# Altium PCB PCB 4-20MA.PcbDoc
Units mil, origin at the board's own origin, x right, y up, seen from the top; angles counter-clockwise.
Board outline 925 x 1250 mil, 2 copper layers (Top Layer, Bottom Layer), stack 65.792 mil thick; 15 components, 10 nets, 35 pads, 0 vias.
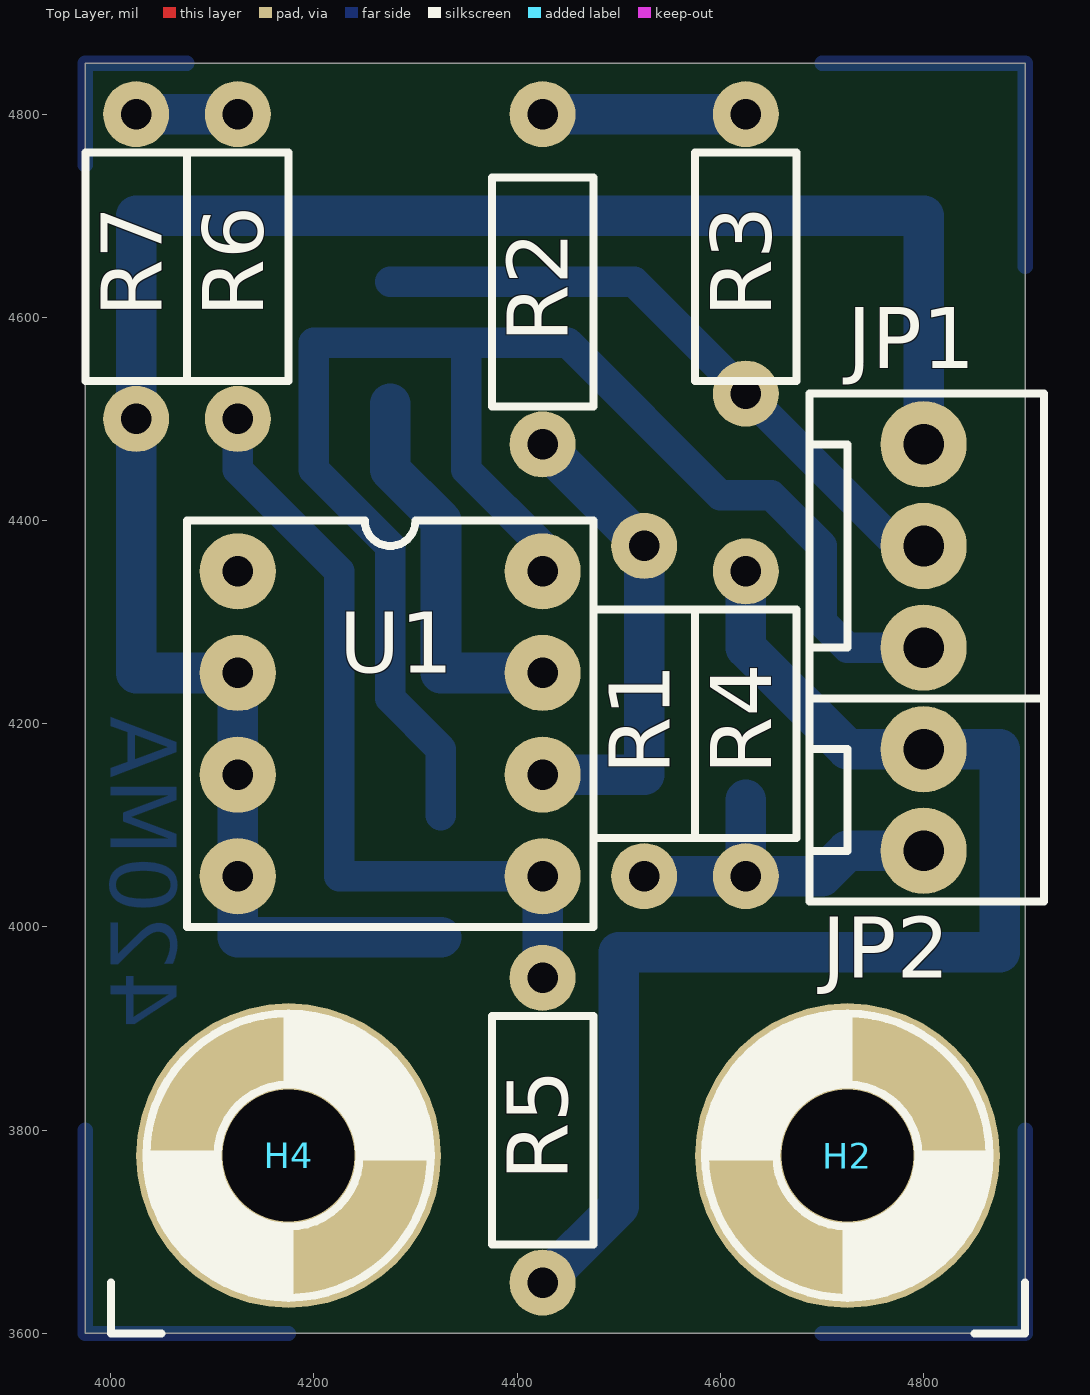
[diagram p0: Top Layer view]
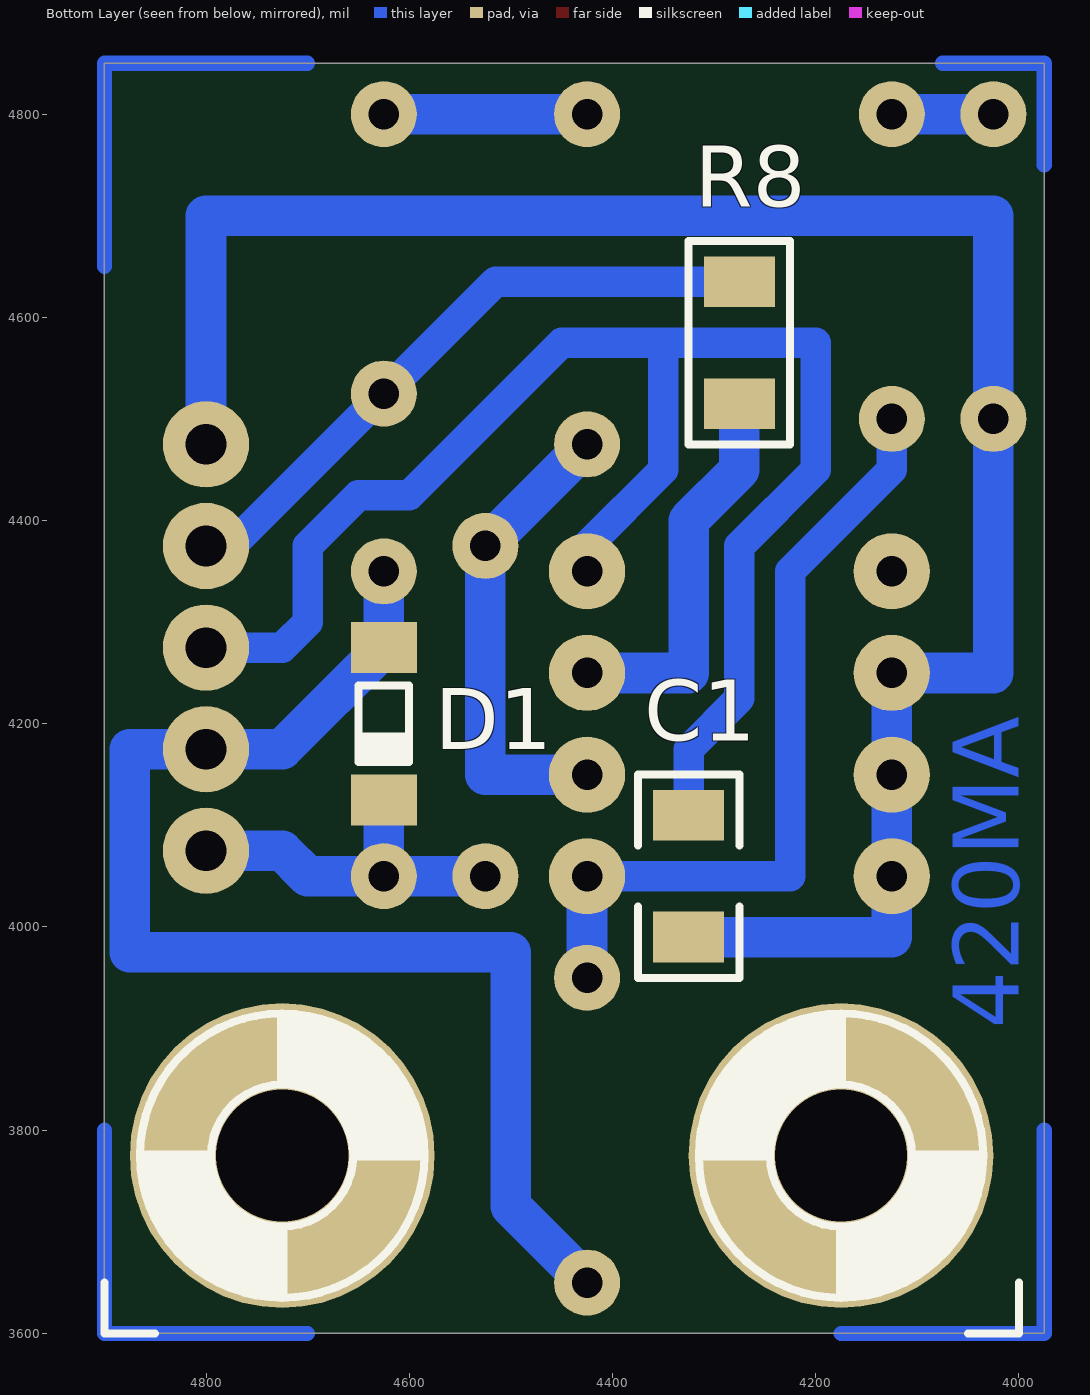
[diagram p1: Bottom Layer view, seen from below]
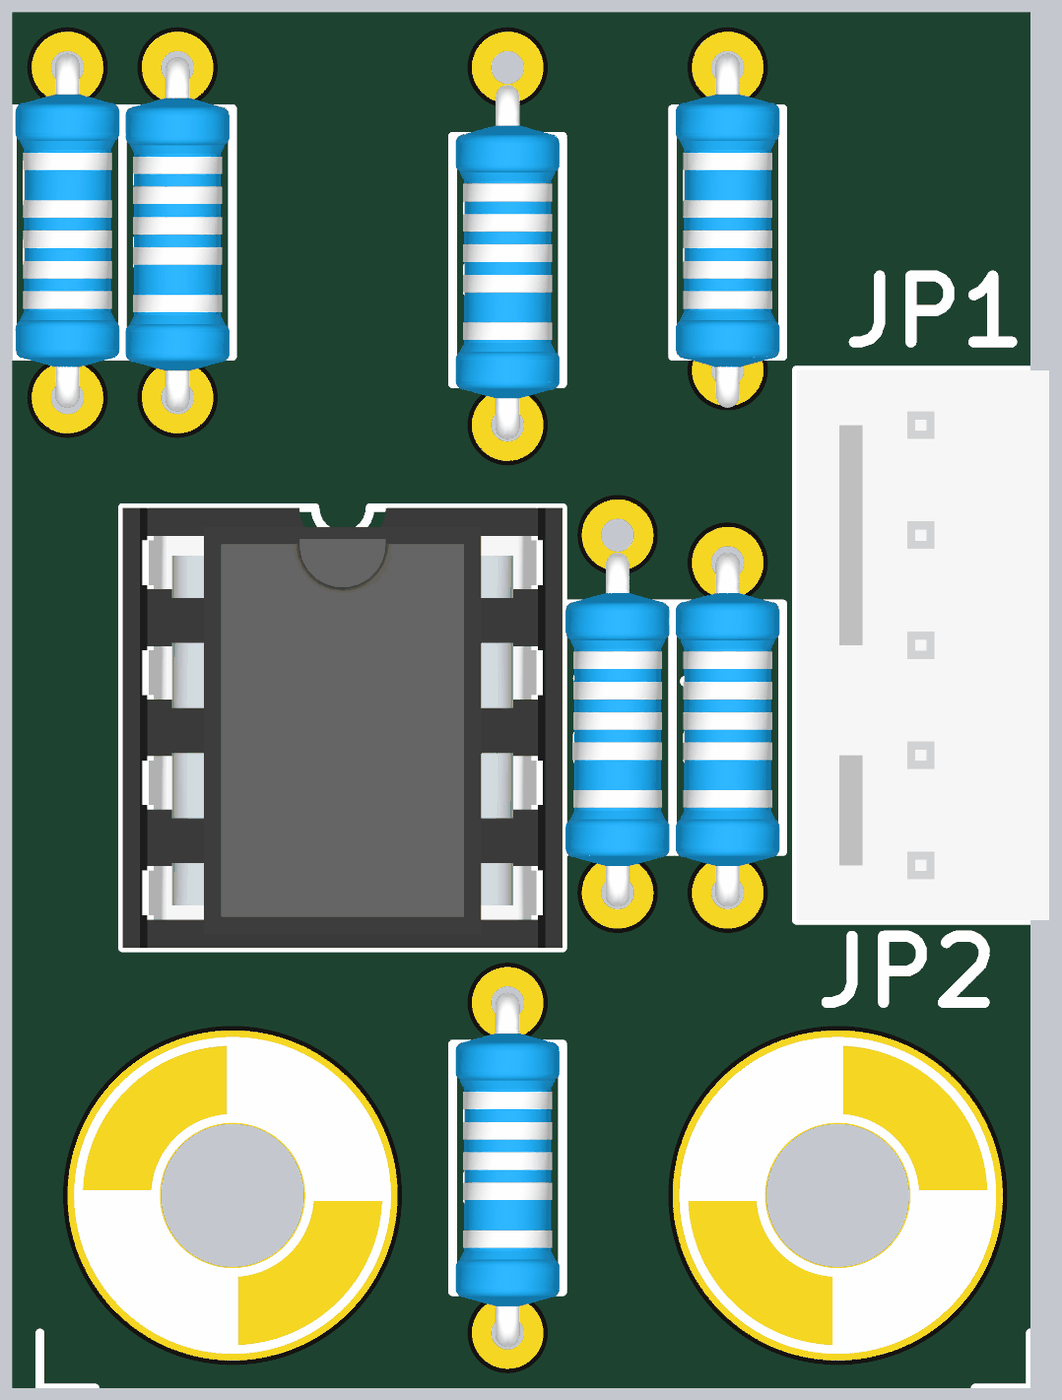
[diagram p2: 3D render of the assembled board from above, using the file's embedded part models]
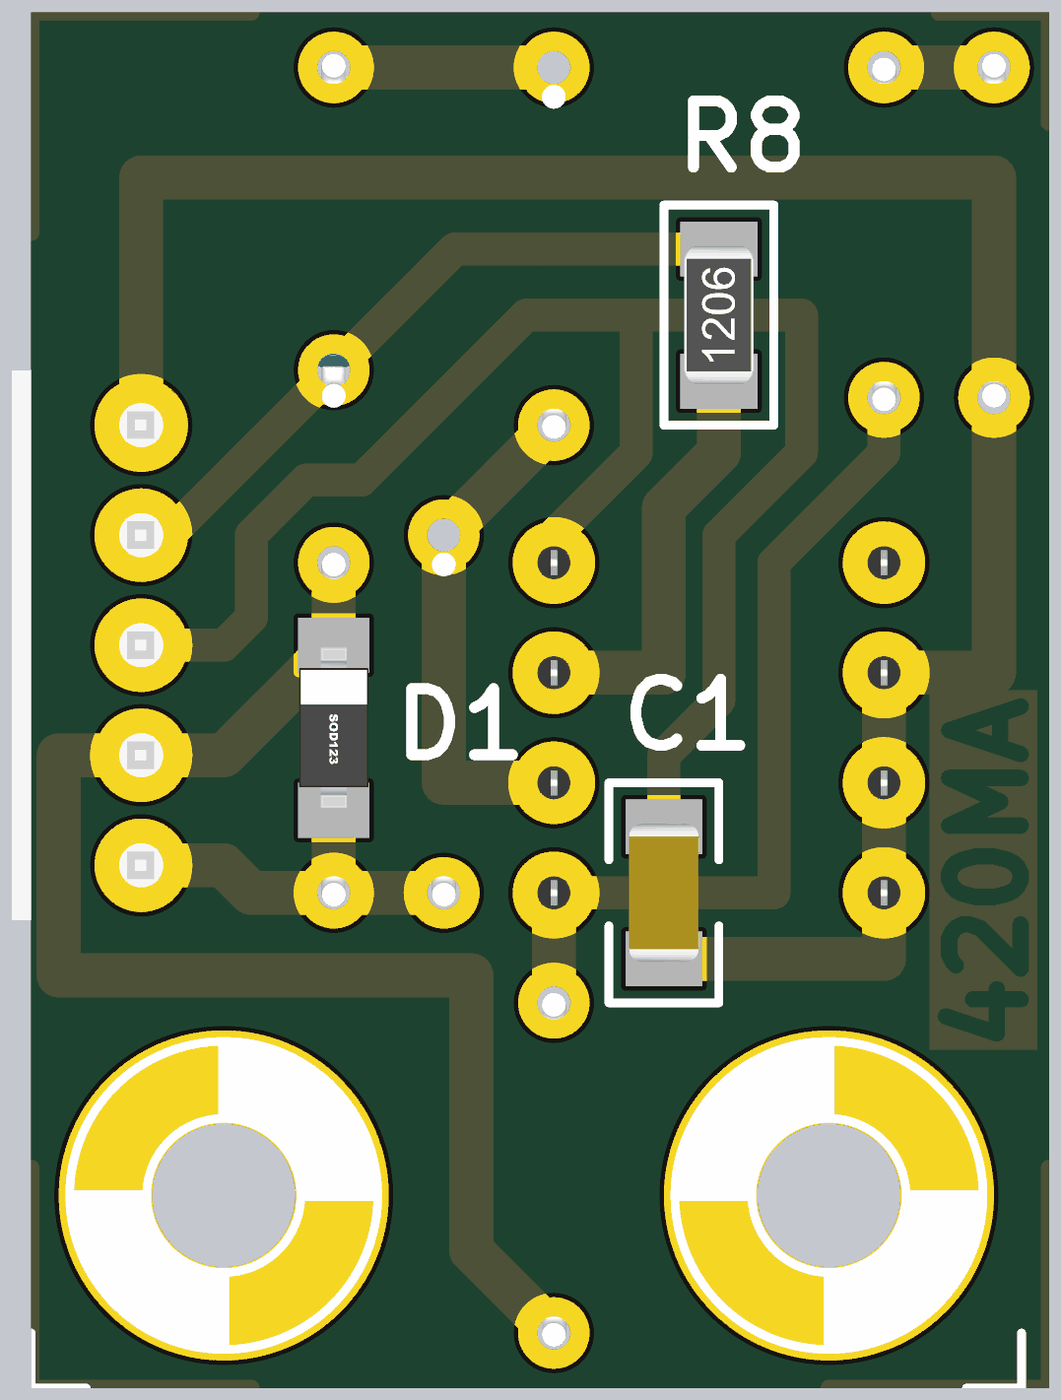
[diagram p3: 3D render of the assembled board from below, using the file's embedded part models]

## Layer stack, top to bottom
Top Layer: signal copper 1.4
Dielectric: core 62.9921, FR-4, Dk 4.8
Bottom Layer: signal copper 1.4

## Board outline
4900,4850 3975,4850 3975,3600 4900,3600

## Design rules (kind name [scope] priority, off if disabled: settings)
Clearance [All] p1: gap=15
PolygonConnect [All] p1: connectstyle=Relief reliefconductorwidth=25 reliefentries=4 polygonreliefangle="90 Angle"
RoutingVias [All] p1: holewidth=28 width=50 viastyle="Through Hole" minholewidth=28 minwidth=50 maxholewidth=28 maxwidth=50
SilkscreenOverComponentPads [All] p1: minsilkscreentomaskgap=10
SolderMaskExpansion [All] p1: expansion=4
Width [All] p1: maxlimit=1000 minlimit=10 preferedwidth=20
27 further rules are at their usual default settings.

## Components (designator, comment, footprint, x,y, rotation, side; value= is the part's Value field where it differs from the comment)
C1 "Capacitor 1206; 100nF; 50V" C1206 4325,4050 r90 bottom
D1 "1N4148" SOD123 4625,4200 r90 bottom
H2 "Agujero de Montaje" agujero 4725,3775 r270 top
H4 "Agujero de Montaje" agujero 4175,3775 r180 top
JP1 "Header3x1" conpol3x1 4800,4325 r90 top
JP2 "Header2x1" CONPOL2X1 4800,4125 r90 top
R1 "Resistencia 1Kohm 5W" RES300th#1 4525,4200 r270 top
R2 "Resistencia 1Kohm 5W" RES300th#1 4425,4625 r270 top
R3 "Resistencia 1Kohm 5W" RES300th#2 4625,4650 r90 top
R4 "Resistencia 1Kohm 5W" RES300th#3 4625,4200 r270 top
R5 "Resistencia 1Kohm 5W" RES300th#3 4425,3800 r270 top
R6 "Resistencia 1Kohm 5W" RES300th#3 4125,4650 r270 top
R7 "Resistencia 1Kohm 5W" RES300th#3 4025,4650 r90 top
R8 "Resistencia 1206; 0ohm" R1206 4275,4575 r90 bottom
U1 "MCP6002" DIP8Z 4125,4350 r0 top

## Footprints (in the part's own frame and the unit in brackets; to place one, negate y for a bottom-side part, rotate by r counter-clockwise, add the part's x,y. Pads: shape width x height; smd on the part's side, far side on the other; paste and mask are expansions set on the pad)
agujero [mil] "AGUJERO DE MONTAJE"
  round 300 hole 130: 1(0,0)
  silkscreen extent -140,-140 175,175
C1206 [mil]
  rect 50x70 smd: 1(-60,0) 2(60,0)
  silkscreen extent -100,-50 100,50, body extent -63,-31 63,31, height 33
CONPOL2X1 [mil] "CONECTOR POLARIZADO 2x1"
  round 85 hole 40: 1(-50,0) 2(50,0)
  silkscreen extent -100,-119 100,112, body extent -100,-118 100,112, height 460
conpol3x1 [mil] "CONECTOR POLARIZADO 3x1"
  round 85 hole 40: 1(-50,0) 2(50,0) 3(150,0)
  silkscreen extent -100,-119 200,113, body extent -100,-118 200,113, height 460
DIP8Z [mil] "ZOCALO DIP 8"
  round 75 hole 30: 1(0,0) 2(0,-100) 3(0,-200) 4(0,-300) 5(300,-300) 6(300,-200) 7(300,-100) 8(300,0)
  silkscreen extent -50,-350 350,50, body extent -50,-350 350,50, height 311
R1206 [mil]
  rect 50x70 smd: 1(-60,0) 2(60,0)
  silkscreen extent -100,-50 100,50, body extent -63,-31 63,31, height 34
RES300th#1 [mil] "RESISTENCIA THROUGH-HOLE"
  round 65 hole 30: 1(-175,0) 2(150,0)
  silkscreen extent -113,-50 113,50, body extent -159,-47 162,47, height 98
RES300th#2 [mil] "RESISTENCIA THROUGH-HOLE"
  round 65 hole 30: 1(-125,0) 2(150,0)
  silkscreen extent -112,-50 112,50, body extent -159,-47 162,47, height 98
RES300th#3 [mil] "RESISTENCIA THROUGH-HOLE"
  round 65 hole 30: 1(-150,0) 2(150,0)
  silkscreen extent -113,-50 113,50, body extent -159,-47 162,47, height 98
SOD123 [mil] "DIODO SMD"
  rect 50x65 smd: 1(75,0) 2(-75,0)
  silkscreen extent -38,-25 38,25, body extent -73,-31 73,32, height 50

## Part data
D1: library part "1N4148 SOD123", "1N4148 SOD123"
JP1: "Header 3x1"
JP2: "Header 2x1"
U1: "1 MHz Bandwidth Low Power Op Amp"

## Nets (pads, with @x,y where several pads share a name; then routed paths per layer and width w, separated by ;. In a path a pad name is that pad's centre, name@x,y a point inside that pad or via, vN(x,y) a via of type N, cw(c..) or ccw(c..) an arc to the next point about the centre after c; other vN are vias at no path point)
GND: C1.1 JP1.3 R7.1 U1.2 U1.3 U1.4 | length 1985
  Bottom Layer w40: U1.4 4125,3990 C1.1 ; U1.4@4125,4075 U1.3 U1.2 4025,4250 4025,4700 4550,4700 4800,4700 JP1.3
IN+: JP2.2 R4.1 R5.2 | length 1297.5
  Bottom Layer w40: R5.2 4500,3725 4500,3975 4875,3975 4875,4175 JP2.2 4725,4175 4625,4275 R4.1
IN-: JP2.1 R1.2 R4.2 | length 360.4
  Bottom Layer w40: R1.2 R4.2 ; 4625,4125 R4.2 ; JP2.1 4725,4075 4700,4050 R4.2
NetR1_1: R1.1 R2.2 U1.6 | length 466.4
  Bottom Layer w40: U1.6 4525,4150 R1.1 R2.2
NetR2_1: R2.1 R3.2 | length 200
  Bottom Layer w40: R2.1 R3.2
NetR5_1: R5.1 R6.2 U1.5 | length 791.4
  Bottom Layer w30: R6.2 4125,4450 4225,4350 4225,4050 U1.5
  Bottom Layer w40: R5.1 U1.5
NetR6_1: R6.1 R7.2 | length 100
  Bottom Layer w40: R7.2 R6.1
NetR8_1: R8.1 U1.7 | length 385.7
  Bottom Layer w40: R8.1 4275,4450 4325,4400 4325,4250 U1.7
OUT: JP1.2 R3.1 R8.2 | length 643.1
  Bottom Layer w30: R8.2 4515,4635 JP1.2@4800,4350
VCC: C1.2 JP1.1 U1.8 | length 1516
  Bottom Layer w30: C1.2 4325,4175 4275,4225 4275,4375 4200,4450 4200,4575 4350,4575 ; U1.8@4425,4375 4350,4450 4350,4575 ; JP1.1 4725,4275 4700,4300 4700,4375 4650,4425 4600,4425 4450,4575 4350,4575
pads on no net: D1.1 D1.2 H2.1 H4.1 U1.1
copper on no net: | length 1400
  Bottom Layer w15: 3975,3800 3975,3600 4175,3600 ; 3975,4750 3975,4850 4075,4850 ; 4700,3600 4900,3600 4900,3800 ; 4700,4850 4900,4850 4900,4650

## Other copper
Bottom Layer:
  text "420MA" at 4000,3900 h65 r270

## Silkscreen, mask and mechanical layers (free items; w line width, h text height)
Mechanical 2:
  rectangle: 4787.5,4062.5 4812.5,4087.5
  rectangle: 4787.5,4162.5 4812.5,4187.5
  rectangle: 4787.5,4262.5 4812.5,4287.5
  rectangle: 4787.5,4362.5 4812.5,4387.5
  rectangle: 4787.5,4462.5 4812.5,4487.5
  lines w10: 4900,4525 4900,4850 ; 4900,4850 3975,4850 3975,3600 4900,3600 4900,4850
  text "GND" at 4950,4450 h50
  text "OUT" at 4950,4350 h50
  text "VCC" at 4950,4250 h50
  text "IN(+)" at 4950,4150 h50
  text "IN(-)" at 4950,4050 h50